# EAGLE board snesram (EAGLE 5.06), part 1 of 2
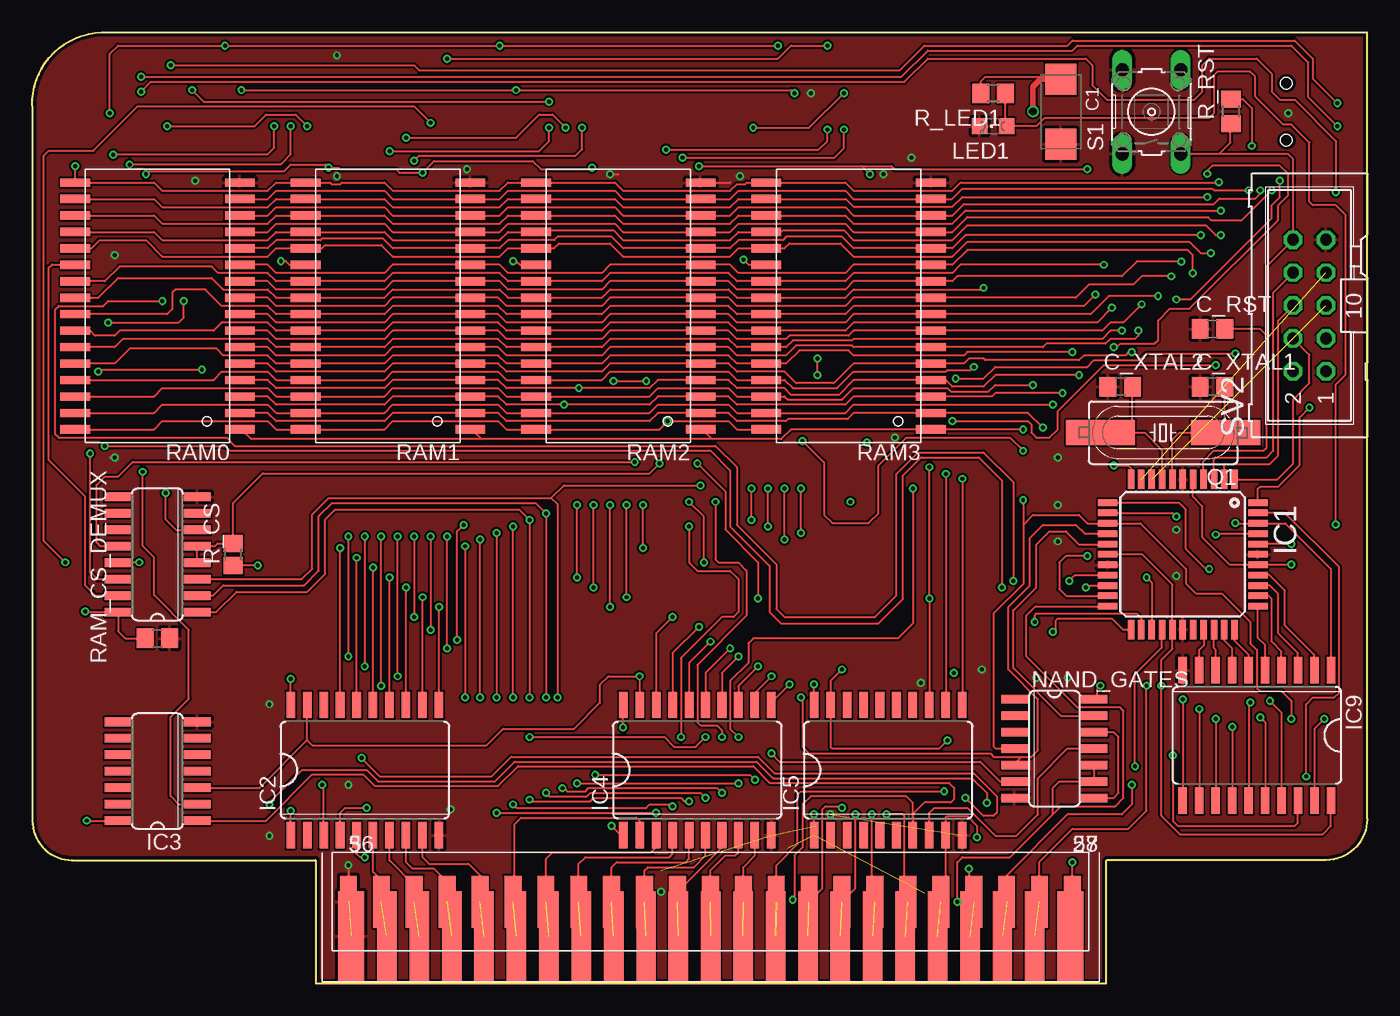
[diagram p0: board, top side]
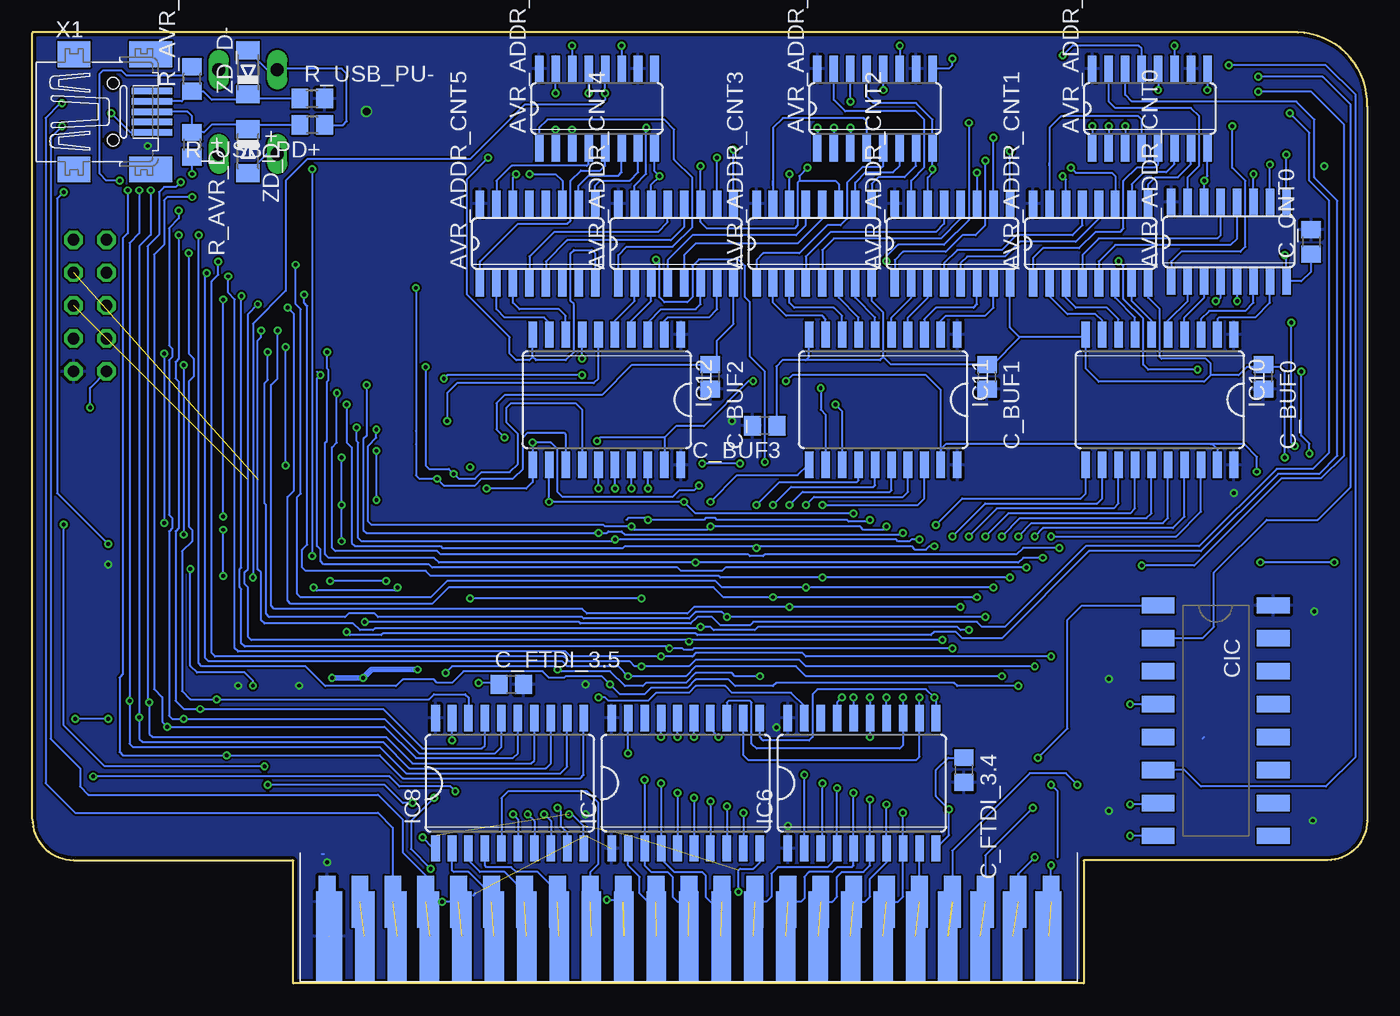
[diagram p1: board, bottom side, seen from below]

Size 103 x 73.41 mm. Coordinates in mm from the lower left corner, seen from the top.
Outline: 103,73.37 103,12.7 arc-90 99.82,9.52 82.93,9.52
Outline: 21.87,9.48 21.87,0 82.87,0 82.87,9.48
Outline: 103,73.41 5.33,73.41 arc90 0,67.69 0,12.57 arc90 3.05,9.52 21.84,9.52
Copper layers (1*16): Top 0.035mm / dielectric 1.5mm / Bottom 0.035mm
Design rules "PropagandaPCB": minimum track width 6mil, minimum drill 10mil, track to track 6mil, track to pad 6mil, pad to pad 6mil, via to via 6mil, smd to smd 6mil, copper to edge 10mil, drill to drill 10mil, minimum pad ring 10mil, minimum via ring 6mil, stop-mask expansion 2mil, vias tented up to drill 100mil, thermal gap 10mil

## Footprints (pad centres in the part's own frame; a part is rotated, then mirrored left to right if it is on the bottom)
SO16 = smd 0.66 x 2.032: 1 -4.445,-3.073; 2 -3.175,-3.073; 3 -1.905,-3.073; 4 -0.635,-3.073; 5 0.635,-3.073; 6 1.905,-3.073; 7 3.175,-3.073; 8 4.445,-3.073; 9 4.445,3.073; 10 3.175,3.073; 11 1.905,3.073; 12 0.635,3.073; 13 -0.635,3.073; 14 -1.905,3.073; 15 -3.175,3.073; 16 -4.445,3.073
SMC_C = smd 2.4 x 2.4: + -2.5,0; - 2.5,0
C0805 = smd 1.3 x 1.5: 1 -0.95,0; 2 0.95,0
DIL16_SMD = smd 1.27 x 2.54: 1 -8.89,-4.445; 2 -6.35,-4.445; 3 -3.81,-4.445; 4 -1.27,-4.445; 5 1.27,-4.445; 6 3.81,-4.445; 7 6.35,-4.445; 8 8.89,-4.445; 9 8.89,4.445; 10 6.35,4.445; 11 3.81,4.445; 12 1.27,4.445; 13 -1.27,4.445; 14 -3.81,4.445; 15 -6.35,4.445; 16 -8.89,4.445
TQFP44 = smd 1.5 x 0.5: 1 -5.8,4; 2 -5.8,3.2; 3 -5.8,2.4; 4 -5.8,1.6; 5 -5.8,0.8; 6 -5.8,0; 7 -5.8,-0.8; 8 -5.8,-1.6; 9 -5.8,-2.4; 10 -5.8,-3.2; 11 -5.8,-4; 23 5.8,-4; 24 5.8,-3.2; 25 5.8,-2.4; 26 5.8,-1.6; 27 5.8,-0.8; 28 5.8,0; 29 5.8,0.8; 30 5.8,1.6; 31 5.8,2.4; 32 5.8,3.2; 33 5.8,4 | smd 0.5 x 1.5: 12 -4,-5.8; 13 -3.2,-5.8; 14 -2.4,-5.8; 15 -1.6,-5.8; 16 -0.8,-5.8; 17 0,-5.8; 18 0.8,-5.8; 19 1.6,-5.8; 20 2.4,-5.8; 21 3.2,-5.8; 22 4,-5.8; 34 4,5.8; 35 3.2,5.8; 36 2.4,5.8; 37 1.6,5.8; 38 0.8,5.8; 39 0,5.8; 40 -0.8,5.8; 41 -1.6,5.8; 42 -2.4,5.8; 43 -3.2,5.8; 44 -4,5.8
SO20W = smd 0.66 x 2.032: 1 -5.715,-5.029; 2 -4.445,-5.029; 3 -3.175,-5.029; 4 -1.905,-5.029; 5 -0.635,-5.029; 6 0.635,-5.029; 7 1.905,-5.029; 8 3.175,-5.029; 9 4.445,-5.029; 10 5.715,-5.029; 11 5.715,5.029; 12 4.445,5.029; 13 3.175,5.029; 14 1.905,5.029; 15 0.635,5.029; 16 -0.635,5.029; 17 -1.905,5.029; 18 -3.175,5.029; 19 -4.445,5.029; 20 -5.715,5.029
SO14 = smd 0.66 x 2.032: 1 -3.81,-3.073; 2 -2.54,-3.073; 3 -1.27,-3.073; 4 0,-3.073; 5 1.27,-3.073; 6 2.54,-3.073; 7 3.81,-3.073; 8 3.81,3.073; 9 2.54,3.073; 10 1.27,3.073; 11 0,3.073; 12 -1.27,3.073; 13 -2.54,3.073; 14 -3.81,3.073
CHIPLED_0805 = smd 1.2 x 1.2: A 0,-1.05; C 0,1.05
HC49UP = smd 5.334 x 1.93: 1 -4.826,0; 2 4.826,0
R0805 = smd 1.3 x 1.5: 1 -0.95,0; 2 0.95,0
R0805' = smd 1.3 x 1.5: 1 -0.85,0; 2 0.85,0
SOP-32 = smd 2.286 x 0.635: 1 -6.35,9.525; 2 -6.35,8.255; 3 -6.35,6.985; 4 -6.35,5.715; 5 -6.35,4.445; 6 -6.35,3.175; 7 -6.35,1.905; 8 -6.35,0.635; 9 -6.35,-0.635; 10 -6.35,-1.905; 11 -6.35,-3.175; 12 -6.35,-4.445; 13 -6.35,-5.715; 14 -6.35,-6.985; 15 -6.35,-8.255; 16 -6.35,-9.525; 17 6.35,-9.525; 18 6.35,-8.255; 19 6.35,-6.985; 20 6.35,-5.715; 21 6.35,-4.445; 22 6.35,-3.175; 23 6.35,-1.905; 24 6.35,-0.635; 25 6.35,0.635; 26 6.35,1.905; 27 6.35,3.175; 28 6.35,4.445; 29 6.35,5.715; 30 6.35,6.985; 31 6.35,8.255; 32 6.35,9.525
B3F-10XX = drill 1.016 long: 1 -3.251,2.261; 2 3.251,2.261; 3 -3.251,-2.261; 4 3.251,-2.261
ML10 = drill 0.914 octagon: 1 -5.08,-1.27; 2 -5.08,1.27; 3 -2.54,-1.27; 4 -2.54,1.27; 5 0,-1.27; 6 0,1.27; 7 2.54,-1.27; 8 2.54,1.27; 9 5.08,-1.27; 10 5.08,1.27
1X31_SNES_HEADER = smd 1.3 x 4: P5 -27.94,0; P6 -25.4,0; P7 -22.86,0; P8 -20.32,0; P9 -17.78,0; P10 -15.24,0; P11 -12.7,0; P12 -10.16,0; P13 -7.62,0; P14 -5.08,0; P15 -2.54,0; P16 0,0; P17 2.54,0; P18 5.08,0; P19 7.62,0; P20 10.16,0; P21 12.7,0; P22 15.24,0; P23 17.78,0; P24 20.32,0; P25 22.86,0; P26 25.4,0; P27 27.94,0
1X31_SNES_HEADERBACK = smd 1.3 x 4 bottom: 36 -27.94,0; 37 -25.4,0; 38 -22.86,0; 39 -20.32,0; 40 -17.78,0; 41 -15.24,0; 42 -12.7,0; 43 -10.16,0; 44 -7.62,0; 45 -5.08,0; 46 -2.54,0; 47 0,0; 48 2.54,0; 49 5.08,0; 50 7.62,0; 51 10.16,0; 52 12.7,0; 53 15.24,0; 54 17.78,0; 55 20.32,0; 56 22.86,0; 57 25.4,0; 58 27.94,0
SNES_CON = smd 2 x 7: 5 2.25,3.5; 27 57.75,3.5 | smd 1.5 x 7: 6 5,3.5; 7 7.5,3.5; 8 10,3.5; 9 12.5,3.5; 10 15,3.5; 11 17.5,3.5; 12 20,3.5; 13 22.5,3.5; 14 25,3.5; 15 27.5,3.5; 16 30,3.5; 17 32.5,3.5; 18 35,3.5; 19 37.5,3.5; 20 40,3.5; 21 42.5,3.5; 22 45,3.5; 23 47.5,3.5; 24 50,3.5; 25 52.5,3.5; 26 55,3.5 | smd 2 x 7 bottom: 36 2.25,3.5; 58 57.75,3.5 | smd 1.5 x 7 bottom: 37 5,3.5; 38 7.5,3.5; 39 10,3.5; 40 12.5,3.5; 41 15,3.5; 42 17.5,3.5; 43 20,3.5; 44 22.5,3.5; 45 25,3.5; 46 27.5,3.5; 47 30,3.5; 48 32.5,3.5; 49 35,3.5; 50 37.5,3.5; 51 40,3.5; 52 42.5,3.5; 53 45,3.5; 54 47.5,3.5; 55 50,3.5; 56 52.5,3.5; 57 55,3.5
32005-201 = smd 3.1 x 0.5: 1 3,1.6; 2 3,0.8; 3 3,0; 4 3,-0.8; 5 3,-1.6 | smd 2.5 x 2: M1 -3,-4.45; M2 -3,4.45 | smd 3.3 x 2: M3 2.9,4.45; M4 2.9,-4.45 | hole 0.9: 0,2.2; 0,-2.2
MINIMELF = smd 1.4 x 1.8: A 1.7,0; C -1.7,0

## Placement (x,y rotation side)
AVR_ADDR_CNT0  40193D  [SO16]  10.67,57.24 0 bottom
AVR_ADDR_CNT1  40193D  [SO16]  21.34,57.12 0 bottom
AVR_ADDR_CNT2  40193D  [SO16]  32,57.12 0 bottom
AVR_ADDR_CNT3  40193D  [SO16]  42.67,57.12 0 bottom
AVR_ADDR_CNT4  40193D  [SO16]  53.34,57.12 0 bottom
AVR_ADDR_CNT5  40193D  [SO16]  64.01,57.12 0 bottom
AVR_ADDR_SREG0  74HCT595D  [SO16]  16.76,67.53 0 bottom
AVR_ADDR_SREG1  74HCT595D  [SO16]  37.97,67.53 0 bottom
AVR_ADDR_SREG2  74HCT595D  [SO16]  59.44,67.53 0 bottom
C1  [SMC_C]  79.38,67.28 270 top
C_BUF0  100n  [C0805]  8,46.83 270 bottom
C_BUF1  100n  [C0805]  29.34,46.83 270 bottom
C_BUF2  100n  [C0805]  50.67,46.83 270 bottom
C_BUF3  100n  [C0805]  46.48,43.05 180 bottom
C_CNT0  100n  [C0805]  4.32,57.24 90 bottom
C_DEMUX  100n  [C0805]  9.65,26.64 180 top
C_FTDI_3.4  100n  [C0805]  31.11,16.48 270 bottom
C_FTDI_3.5  100n  [C0805]  66.04,23.08 0 bottom
C_RST  47n  [C0805]  91.06,50.51 0 top
C_XTAL1  22p  [C0805]  91.06,46.07 0 top
C_XTAL2  22p  [C0805]  83.95,46.07 0 top
CIC  DIL16_SMD  [DIL16_SMD]  11.68,20.29 270 bottom
IC1  ATMEGA644A  [TQFP44]  88.77,33.11 270 top
IC2  74LS245DW  [SO20W]  25.65,16.48 0 top
IC3  74HC32D  [SO14]  9.65,16.38 90 top
IC4  74LS245DW  [SO20W]  51.31,16.48 0 top
IC5  74LS245DW  [SO20W]  66.04,16.48 0 top
IC6  74LS245DW  [SO20W]  38.99,15.46 0 bottom
IC7  74LS245DW  [SO20W]  52.58,15.46 0 bottom
IC8  74LS245DW  [SO20W]  66.17,15.46 0 bottom
IC9  74LS245DW  [SO20W]  94.49,19.14 180 top
IC10  74LS245DW  [SO20W]  16,45.05 180 bottom
IC11  74LS245DW  [SO20W]  37.34,45.05 180 bottom
IC12  74LS245DW  [SO20W]  58.67,45.05 180 bottom
LED1  2-4mA  [CHIPLED_0805]  74.14,66.17 90 top
NAND_GATES  74S00D  [SO14]  78.87,18.13 270 top
Q1  20MHz  [HC49UP]  87.25,42.51 180 top
R_AVR_D+  68  [R0805]  90.68,64.74 270 bottom
R_AVR_D-  68  [R0805]  90.68,69.82 90 bottom
R_CS  200  [R0805']  15.49,33.11 90 top
R_LED1  1k6  [R0805]  74.14,68.71 180 top
R_RST  4k7  [R0805]  92.49,67.31 90 top
R_USB_PD+  1M  [R0805]  81.41,66.26 180 bottom
R_USB_PU-  1k5  [R0805]  81.41,68.29 0 bottom
RAM0  KM628512-XX  [SOP-32]  9.65,52.29 180 top
RAM1  KM628512-XX  [SOP-32]  27.43,52.29 180 top
RAM2  KM628512-XX  [SOP-32]  45.21,52.29 180 top
RAM3  KM628512-XX  [SOP-32]  62.99,52.29 180 top
RAM_CS_DEMUX  74LS138D  [SO16]  9.65,33.11 90 top
S1  [B3F-10XX]  86.36,67.28 90 top
SV2  [ML10]  98.55,52.32 90 top
U$1  SNES_CON_1  [1X31_SNES_HEADER]  52.32,6.32 0 top
U$2  SNES_CON_2  [1X31_SNES_HEADERBACK]  52.32,6.32 0 top
U$3  SNES_CON_FRONT  [SNES_CON]  22.35,0.13 0 top
X1  MINI-USB  [32005-201]  96.77,67.28 0 bottom
ZD_D+  3.6V  [MINIMELF]  86.36,64.23 270 bottom
ZD_D-  3.6V  [MINIMELF]  86.36,70.33 90 bottom

## Library data of the parts
AVR_ADDR_CNT0 AVR_ADDR_CNT1-AVR_ADDR_CNT5 = 40xx
AVR_ADDR_SREG0 AVR_ADDR_SREG1 AVR_ADDR_SREG2 IC2-IC12 RAM_CS_DEMUX = 74xx-eu
C1 C_BUF0 C_BUF1-C_BUF3 C_CNT0 C_DEMUX C_FTDI_3.4 C_FTDI_3.5 C_RST C_XTAL1 C_XTAL2 R_AVR_D+ R_AVR_D- R_LED1 R_RST R_USB_PD+ R_USB_PU- = rcl
CIC = ic-package
IC1 = atmel
LED1 = led
NAND_GATES = 74xx-us
Q1 = crystal
R_CS = resistor
RAM0 RAM1-RAM3 = memory-samsung-2
S1 = switch-omron
SV2 = con-harting-ml
U$1-U$3 = snes_con
X1 = con-cypressindustries
ZD_D+ ZD_D- = diode

## Nets
A0: IC4.11 IC10.16 RAM0.12 RAM1.12 RAM2.12 RAM3.12
A1: IC4.12 IC10.15 RAM0.11 RAM1.11 RAM2.11 RAM3.11
A2: IC4.13 IC10.17 RAM0.10 RAM1.10 RAM2.10 RAM3.10
A3: IC4.14 IC10.18 RAM0.9 RAM1.9 RAM2.9 RAM3.9
A4: IC4.15 IC10.12 RAM0.8 RAM1.8 RAM2.8 RAM3.8
A5: IC4.16 IC10.11 RAM0.7 RAM1.7 RAM2.7 RAM3.7
A6: IC4.17 IC10.13 RAM0.6 RAM1.6 RAM2.6 RAM3.6
A7: IC4.18 IC10.14 RAM0.5 RAM1.5 RAM2.5 RAM3.5
A8: IC2.11 IC11.16 RAM0.27 RAM1.27 RAM2.27 RAM3.27
A9: IC2.12 IC11.15 RAM0.26 RAM1.26 RAM2.26 RAM3.26
A10: IC2.13 IC11.17 RAM0.23 RAM1.23 RAM2.23 RAM3.23
A11: IC2.14 IC11.18 RAM0.25 RAM1.25 RAM2.25 RAM3.25
A12: IC2.15 IC11.12 RAM0.4 RAM1.4 RAM2.4 RAM3.4
A13: IC2.16 IC11.11 RAM0.28 RAM1.28 RAM2.28 RAM3.28
A14: IC2.17 IC11.13 RAM0.3 RAM1.3 RAM2.3 RAM3.3
A15: IC6.11 IC7.11 IC11.14 RAM0.31 RAM1.31 RAM2.31 RAM3.31
A16: IC6.12 IC7.12 IC12.16 RAM0.2 RAM1.2 RAM2.2 RAM3.2
A17: IC6.13 IC7.13 IC12.15 RAM0.30 RAM1.30 RAM2.30 RAM3.30
A18: IC6.14 IC7.14 IC12.17 RAM0.1 RAM1.1 RAM2.1 RAM3.1
A19: IC6.15 IC7.15 IC12.18 RAM_CS_DEMUX.1
A20: IC6.16 IC7.16 IC12.12 RAM_CS_DEMUX.2
A21: IC6.17 IC7.17 IC12.11 RAM_CS_DEMUX.3
AVR/SNES_SW: IC1.14 IC3.2 IC9.19 IC10.19 IC11.19 IC12.19 NAND_GATES.4
AVR/SNES_SW_INV: IC2.19 IC3.3 IC4.19 IC5.19 IC8.19
AVR_ADDR_DWN: AVR_ADDR_CNT0.4 IC1.20
AVR_ADDR_LATCH: AVR_ADDR_SREG0.12 AVR_ADDR_SREG1.12 AVR_ADDR_SREG2.12 IC1.25
AVR_ADDR_LOAD: AVR_ADDR_CNT0.11 AVR_ADDR_CNT1.11 AVR_ADDR_CNT2.11 AVR_ADDR_CNT3.11 AVR_ADDR_CNT4.11 AVR_ADDR_CNT5.11 IC1.21
AVR_ADDR_SCK: AVR_ADDR_SREG0.11 AVR_ADDR_SREG1.11 AVR_ADDR_SREG2.11 IC1.24
AVR_ADDR_SER: AVR_ADDR_SREG0.14 IC1.23
AVR_ADDR_UP: AVR_ADDR_CNT0.5 IC1.19
AVR_CS/: IC1.40 R_CS.1
AVR_D0: IC1.37 IC9.2
AVR_D1: IC1.36 IC9.3
AVR_D2: IC1.35 IC9.4
AVR_D3: IC1.34 IC9.5
AVR_D4: IC1.33 IC9.6
AVR_D5: IC1.32 IC9.7
AVR_D6: IC1.31 IC9.8
AVR_D7: IC1.30 IC9.9
AVR_D+: R_AVR_D+.1 R_USB_PD+.2 X1.3 ZD_D+.C
AVR_D-: R_AVR_D-.1 R_USB_PU-.1 X1.2 ZD_D-.C
AVR_RD/: IC1.42 IC9.1 IC12.7
AVR_SNES_WR_EN: IC1.16 NAND_GATES.13
AVR_UART_RX: IC1.9 SV2.5
AVR_UART_TX: IC1.10 SV2.7
AVR_WR/: IC1.41 IC12.6
CS/: IC5.13 R_CS.2 RAM_CS_DEMUX.4 RAM_CS_DEMUX.5
CS_RAM0: RAM0.22 RAM_CS_DEMUX.15
CS_RAM1: RAM1.22 RAM_CS_DEMUX.14
CS_RAM2: RAM2.22 RAM_CS_DEMUX.13
CS_RAM3: RAM3.22 RAM_CS_DEMUX.12
D0: IC8.11 IC9.18 RAM0.13 RAM1.13 RAM2.13 RAM3.13
D1: IC8.12 IC9.17 RAM0.14 RAM1.14 RAM2.14 RAM3.14
D2: IC8.13 IC9.16 RAM0.15 RAM1.15 RAM2.15 RAM3.15
D3: IC8.14 IC9.15 RAM0.17 RAM1.17 RAM2.17 RAM3.17
D4: IC8.15 IC9.14 RAM0.18 RAM1.18 RAM2.18 RAM3.18
D5: IC8.16 IC9.13 RAM0.19 RAM1.19 RAM2.19 RAM3.19
D6: IC8.17 IC9.12 RAM0.20 RAM1.20 RAM2.20 RAM3.20
D7: IC8.18 IC9.11 RAM0.21 RAM1.21 RAM2.21 RAM3.21
GND: AVR_ADDR_CNT0.8 AVR_ADDR_CNT0.14 AVR_ADDR_CNT1.8 AVR_ADDR_CNT1.14 AVR_ADDR_CNT2.8 AVR_ADDR_CNT2.14 AVR_ADDR_CNT3.8 AVR_ADDR_CNT3.14 AVR_ADDR_CNT4.8 AVR_ADDR_CNT4.14 AVR_ADDR_CNT5.8 AVR_ADDR_CNT5.14 AVR_ADDR_SREG0.8 AVR_ADDR_SREG0.13 AVR_ADDR_SREG1.8 AVR_ADDR_SREG1.13 AVR_ADDR_SREG2.8 AVR_ADDR_SREG2.13 C1.- C_BUF0.1 C_BUF1.1 C_BUF2.1 C_BUF3.1 C_CNT0.1 C_DEMUX.1 C_FTDI_3.4.1 C_FTDI_3.5.1 C_RST.1 C_XTAL1.1 C_XTAL2.1 CIC.4 CIC.8 IC1.6 IC1.18 IC1.28 IC1.39 IC2.10 IC3.7 IC4.10 IC5.10 IC6.10 IC7.10 IC8.10 IC9.10 IC10.10 IC11.10 IC12.10 LED1.C NAND_GATES.7 R_USB_PD+.1 RAM0.16 RAM1.16 RAM2.16 RAM3.16 RAM_CS_DEMUX.8 S1.1 S1.2 SV2.9 U$1.P5 U$2.36 U$3.5 U$3.36 X1.5 ZD_D+.A ZD_D-.A
HI/LOROM_SW: IC1.15 IC6.19 NAND_GATES.5
HI/LOROM_SW_INV: IC7.19 NAND_GATES.6
ISP_MISO: IC1.2 SV2.6
ISP_MOSI: IC1.1 SV2.4
ISP_RST: C_RST.2 IC1.4 R_RST.1 S1.3 SV2.10
ISP_SCK: IC1.3 SV2.8
LED: IC1.26 LED1.A R_LED1.1
MMC_CS: IC1.44 SV2.2
N$1: AVR_ADDR_CNT0.7 IC10.2
N$2: AVR_ADDR_CNT2.3 IC11.4
N$3: AVR_ADDR_CNT0.2 IC10.5
N$4: AVR_ADDR_CNT0.3 IC10.4
N$5: AVR_ADDR_CNT1.7 IC10.6
N$6: AVR_ADDR_CNT1.6 IC10.7
N$7: AVR_ADDR_CNT1.2 IC10.9
N$8: AVR_ADDR_CNT1.3 IC10.8
N$9: AVR_ADDR_CNT0.12 AVR_ADDR_CNT1.5
N$10: AVR_ADDR_CNT0.13 AVR_ADDR_CNT1.4
N$11: AVR_ADDR_SREG0.9 AVR_ADDR_SREG1.14
N$12: AVR_ADDR_CNT0.15 AVR_ADDR_SREG0.15
N$13: AVR_ADDR_CNT0.1 AVR_ADDR_SREG0.1
N$14: AVR_ADDR_CNT0.10 AVR_ADDR_SREG0.2
N$15: AVR_ADDR_CNT0.9 AVR_ADDR_SREG0.3
N$16: AVR_ADDR_CNT1.15 AVR_ADDR_SREG0.4
N$17: AVR_ADDR_CNT1.1 AVR_ADDR_SREG0.5
N$18: AVR_ADDR_CNT1.10 AVR_ADDR_SREG0.6
N$19: AVR_ADDR_CNT1.9 AVR_ADDR_SREG0.7
N$20: AVR_ADDR_CNT3.9 AVR_ADDR_SREG1.7
N$21: AVR_ADDR_CNT2.1 AVR_ADDR_SREG1.1
N$22: AVR_ADDR_CNT2.10 AVR_ADDR_SREG1.2
N$23: AVR_ADDR_CNT2.9 AVR_ADDR_SREG1.3
N$24: AVR_ADDR_CNT1.12 AVR_ADDR_CNT2.5
N$25: AVR_ADDR_CNT1.13 AVR_ADDR_CNT2.4
N$26: AVR_ADDR_CNT2.2 IC11.5
N$27: AVR_ADDR_CNT2.6 IC11.3
N$28: AVR_ADDR_CNT2.7 IC11.2
N$29: AVR_ADDR_CNT4.3 IC12.4
N$30: AVR_ADDR_CNT3.15 AVR_ADDR_SREG1.4
N$31: AVR_ADDR_CNT3.1 AVR_ADDR_SREG1.5
N$32: AVR_ADDR_CNT3.10 AVR_ADDR_SREG1.6
N$33: AVR_ADDR_CNT3.3 IC11.8
N$34: AVR_ADDR_CNT3.2 IC11.9
N$35: AVR_ADDR_CNT3.6 IC11.7
N$36: AVR_ADDR_CNT3.7 IC11.6
N$37: AVR_ADDR_CNT2.15 AVR_ADDR_SREG1.15
N$38: AVR_ADDR_SREG1.9 AVR_ADDR_SREG2.14
N$39: AVR_ADDR_CNT2.12 AVR_ADDR_CNT3.5
N$40: AVR_ADDR_CNT2.13 AVR_ADDR_CNT3.4
N$41: AVR_ADDR_CNT3.12 AVR_ADDR_CNT4.5
N$42: AVR_ADDR_CNT3.13 AVR_ADDR_CNT4.4
N$43: AVR_ADDR_CNT4.2 IC12.5
N$44: AVR_ADDR_CNT4.6 IC12.3
N$45: AVR_ADDR_CNT4.7 IC12.2
N$46: NAND_GATES.8 NAND_GATES.12
N$47: AVR_ADDR_CNT4.12 AVR_ADDR_CNT5.5
N$48: AVR_ADDR_CNT4.13 AVR_ADDR_CNT5.4
N$49: AVR_ADDR_CNT5.3 IC12.8
N$50: AVR_ADDR_CNT5.2 IC12.9
N$52: IC5.8 NAND_GATES.11
N$53: AVR_ADDR_CNT4.15 AVR_ADDR_SREG2.15
N$54: AVR_ADDR_CNT4.1 AVR_ADDR_SREG2.1
N$55: AVR_ADDR_CNT4.10 AVR_ADDR_SREG2.2
N$56: AVR_ADDR_CNT4.9 AVR_ADDR_SREG2.3
N$57: AVR_ADDR_CNT5.15 AVR_ADDR_SREG2.4
N$58: AVR_ADDR_CNT5.1 AVR_ADDR_SREG2.5
N$59: AVR_ADDR_CNT5.10 AVR_ADDR_SREG2.6
N$60: AVR_ADDR_CNT5.9 AVR_ADDR_SREG2.7
N$61: IC1.13 R_AVR_D-.2
N$62: IC1.11 R_AVR_D+.2
N$63: C_XTAL2.2 IC1.8 Q1.2
N$64: AVR_ADDR_CNT0.6 IC10.3
N$68: C_XTAL1.2 IC1.7 Q1.1
OE/: IC5.11 IC12.13 RAM0.24 RAM1.24 RAM2.24 RAM3.24
SNES_PIN06_A11: IC2.6 U$1.P6 U$3.6
SNES_PIN07_A10: IC2.7 U$1.P7 U$3.7
SNES_PIN08_A9: IC2.8 U$1.P8 U$3.8
SNES_PIN09_A8: IC2.9 U$1.P9 U$3.9
SNES_PIN10_A7: IC4.2 U$1.P10 U$3.10
SNES_PIN11_A6: IC4.3 U$1.P11 U$3.11
SNES_PIN12_A5: IC4.4 U$1.P12 U$3.12
SNES_PIN13_A4: IC4.5 U$1.P13 U$3.13
SNES_PIN14_A3: IC4.6 U$1.P14 U$3.14
SNES_PIN15_A2: IC4.7 U$1.P15 U$3.15
SNES_PIN16_A1: IC4.8 U$1.P16 U$3.16
SNES_PIN17_A0: IC4.9 U$1.P17 U$3.17
SNES_PIN18_/IRQ: IC1.43 U$1.P18 U$3.18
SNES_PIN19_D0: IC8.9 U$1.P19 U$3.19
SNES_PIN20_D1: IC8.8 U$1.P20 U$3.20
SNES_PIN21_D2: IC8.7 U$1.P21 U$3.21
SNES_PIN22_D3: IC8.6 U$1.P22 U$3.22
SNES_PIN23_/RD: IC5.9 IC8.1 U$1.P23 U$3.23
SNES_PIN24_CICO1: CIC.1 U$1.P24 U$3.24
SNES_PIN25_CICI7: CIC.7 U$1.P25 U$3.25
SNES_PIN37_A12: IC2.5 U$2.37 U$3.37
SNES_PIN38_A13: IC2.4 U$2.38 U$3.38
SNES_PIN39_A14: IC2.3 U$2.39 U$3.39
SNES_PIN40_A15: IC6.9 U$2.40 U$3.40
SNES_PIN41_BA0: IC6.8 IC7.9 U$2.41 U$3.41
SNES_PIN42_BA1: IC6.7 IC7.8 U$2.42 U$3.42
SNES_PIN43_BA2: IC6.6 IC7.7 U$2.43 U$3.43
SNES_PIN44_BA3: IC6.5 IC7.6 U$2.44 U$3.44
SNES_PIN45_BA4: IC6.4 IC7.5 U$2.45 U$3.45
SNES_PIN46_BA5: IC6.3 IC7.4 U$2.46 U$3.46
SNES_PIN47_BA6: IC6.2 IC7.3 U$2.47 U$3.47
SNES_PIN48_BA7: IC7.2 U$2.48 U$3.48
SNES_PIN49_/CS: IC3.1 IC5.7 U$2.49 U$3.49
SNES_PIN50_D4: IC8.5 U$2.50 U$3.50
SNES_PIN51_D5: IC8.4 U$2.51 U$3.51
SNES_PIN52_D6: IC8.3 U$2.52 U$3.52
SNES_PIN53_D7: IC8.2 U$2.53 U$3.53
SNES_PIN54_/WR: IC1.22 NAND_GATES.9 NAND_GATES.10 U$2.54 U$3.54
SNES_PIN55_CICO2: CIC.2 U$2.55 U$3.55
SNES_PIN56_CICI6: CIC.6 U$2.56 U$3.56
SNES_PIN_26_RST: IC1.12 U$1.P26 U$3.26
VCC: AVR_ADDR_CNT0.16 AVR_ADDR_CNT1.16 AVR_ADDR_CNT2.16 AVR_ADDR_CNT3.16 AVR_ADDR_CNT4.16 AVR_ADDR_CNT5.16 AVR_ADDR_SREG0.10 AVR_ADDR_SREG0.16 AVR_ADDR_SREG1.10 AVR_ADDR_SREG1.16 AVR_ADDR_SREG2.10 AVR_ADDR_SREG2.16 C1.+ C_BUF0.2 C_BUF1.2 C_BUF2.2 C_BUF3.2 C_CNT0.2 C_DEMUX.2 C_FTDI_3.4.2 C_FTDI_3.5.2 CIC.16 IC1.5 IC1.17 IC1.27 IC1.38 IC2.1 IC2.20 IC3.14 IC4.1 IC4.20 IC5.1 IC5.20 IC6.1 IC6.20 IC7.1 IC7.20 IC8.20 IC9.20 IC10.1 IC10.20 IC11.1 IC11.20 IC12.1 IC12.20 NAND_GATES.14 R_LED1.2 R_RST.2 R_USB_PU-.2 RAM0.32 RAM1.32 RAM2.32 RAM3.32 RAM_CS_DEMUX.6 RAM_CS_DEMUX.16 SV2.1 U$1.P27 U$2.58 U$3.27 U$3.58
WE/: IC5.12 IC12.14 RAM0.29 RAM1.29 RAM2.29 RAM3.29